# Altium PCB CNC_shield_mkr1000_PCB_Header_NormalHeader.PcbDoc
Units mm, origin at the board's own origin, x right, y up, seen from the top; angles counter-clockwise.
Board outline 120.25 x 80.25 mm, 2 copper layers (Top Layer, Bottom Layer); 13 components, 32 nets, 111 pads, 0 vias.
Unrouted connection lines stored in the file: 2.
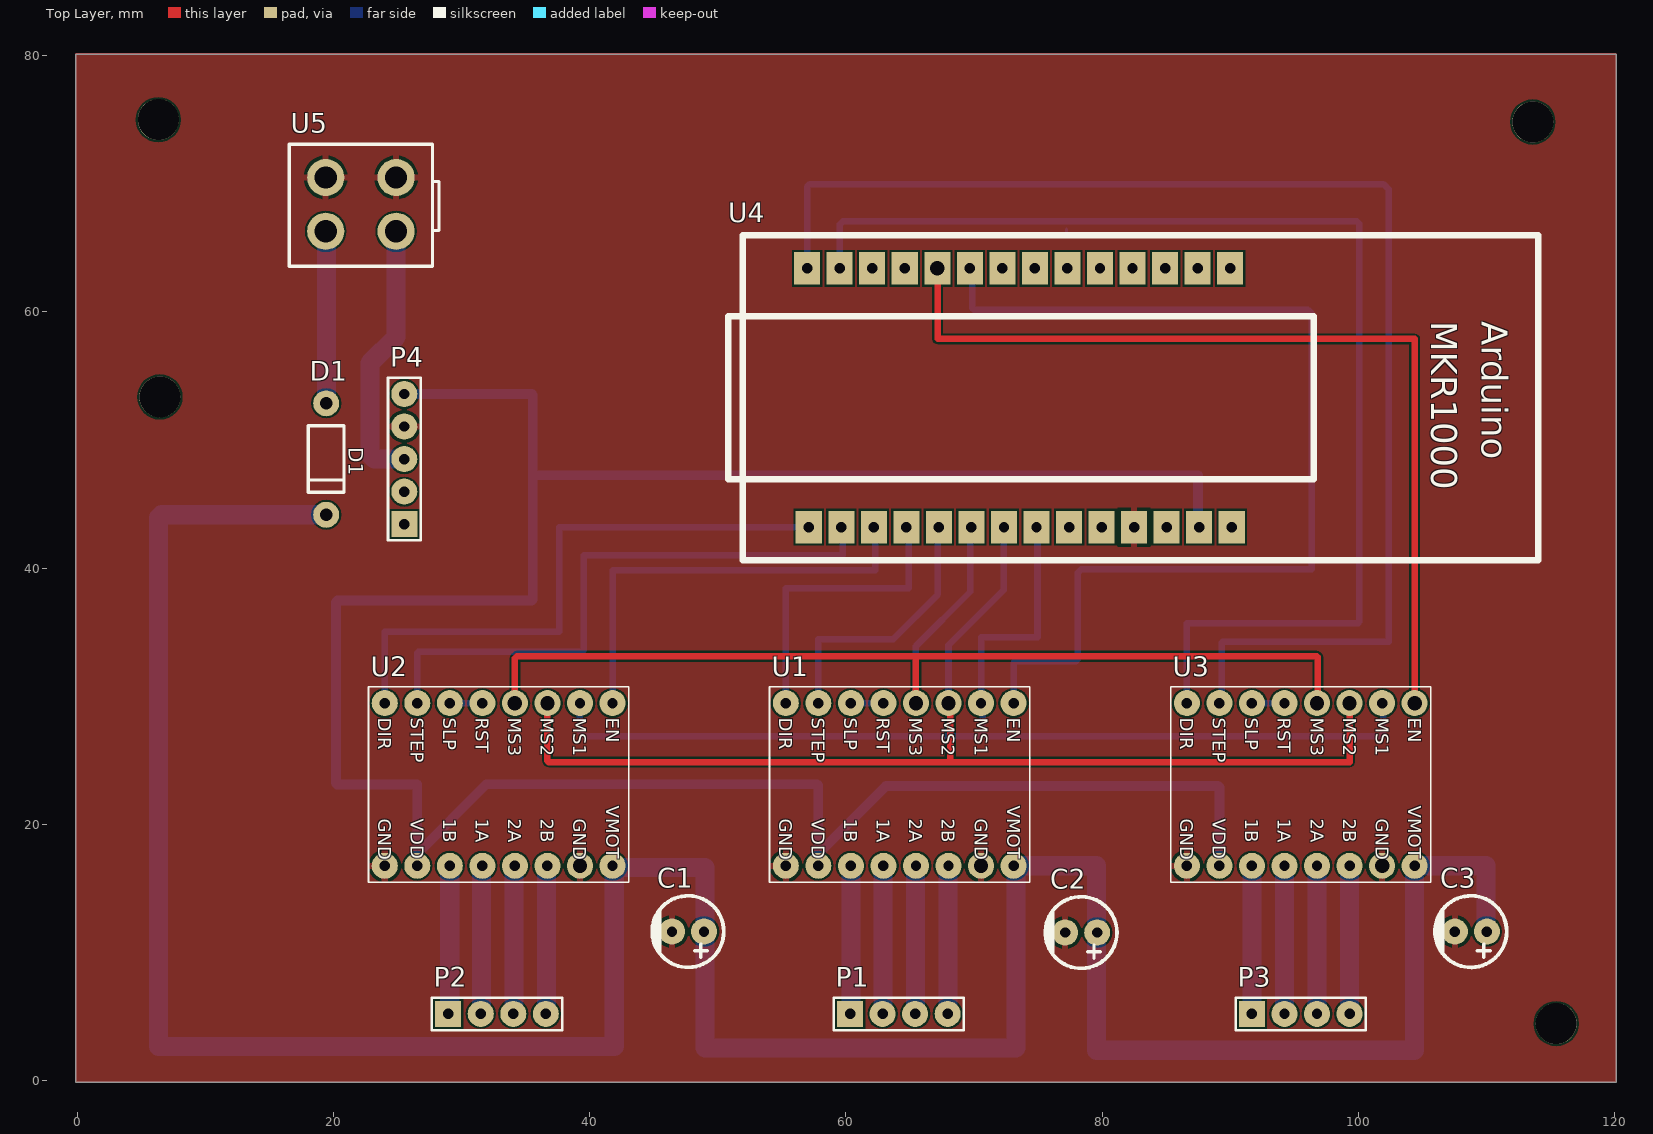
[diagram p0: Top Layer view]
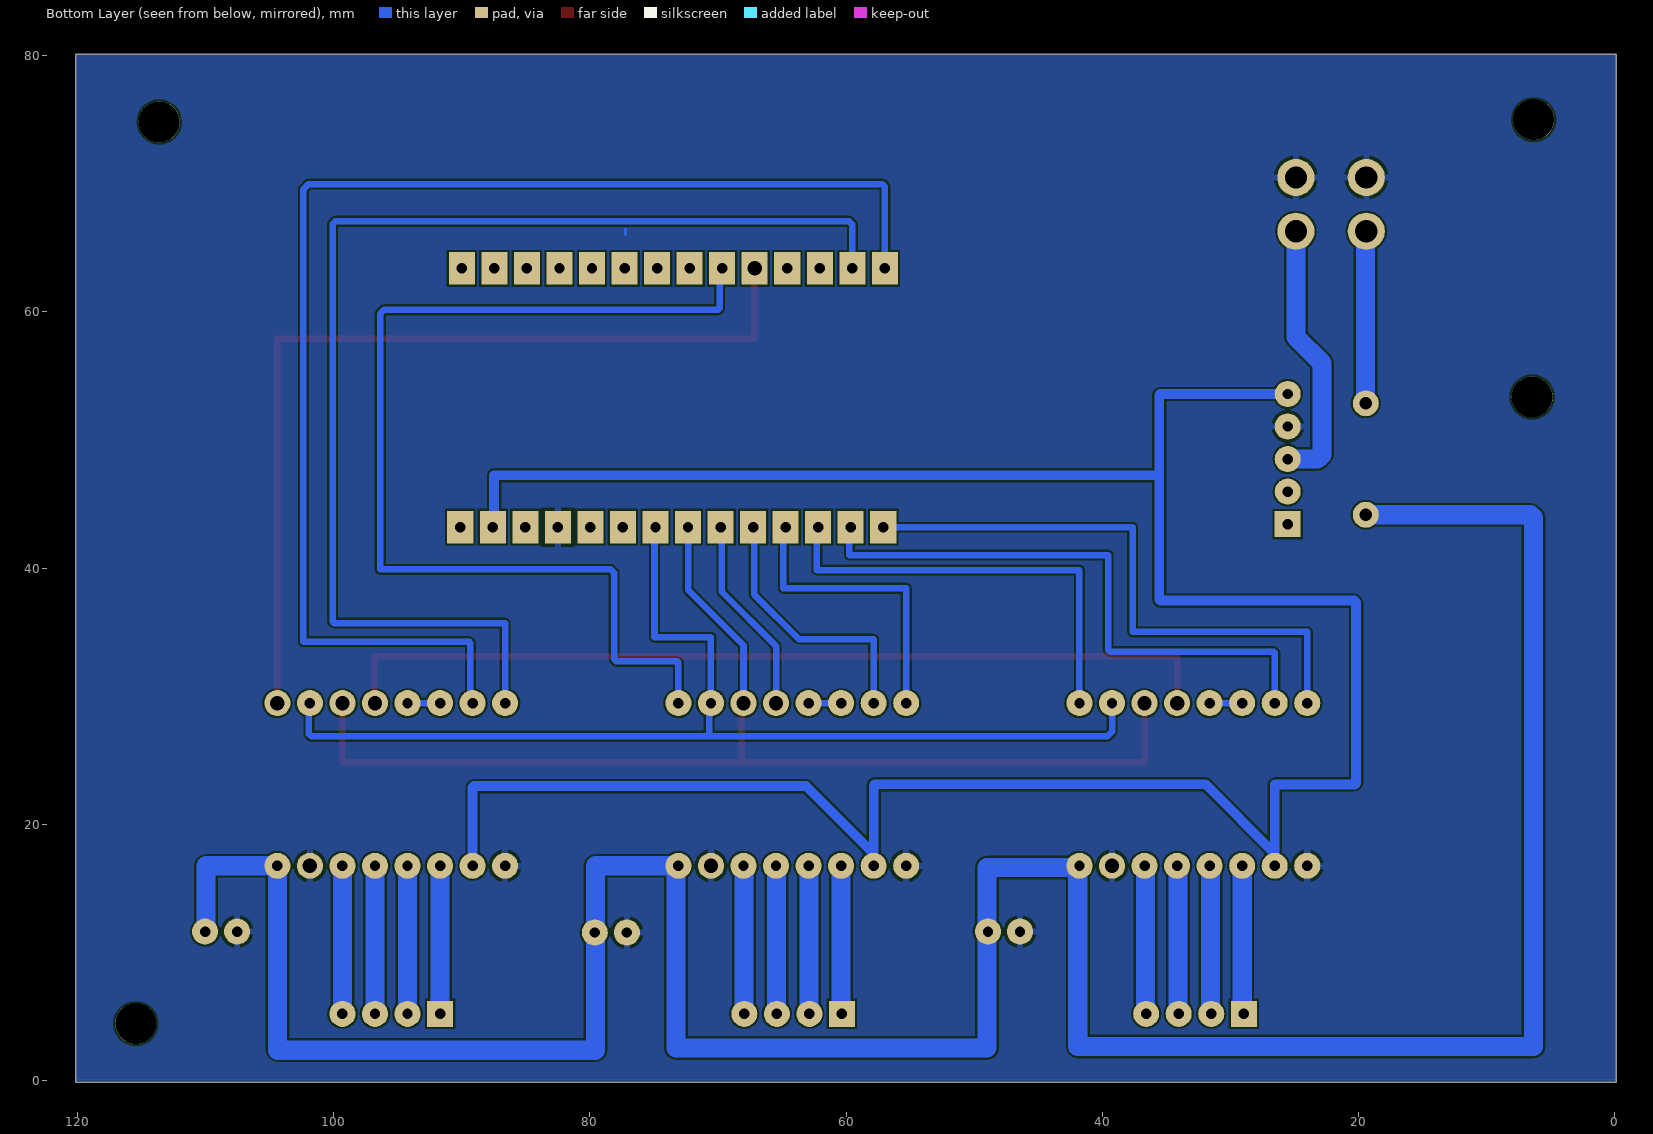
[diagram p1: Bottom Layer view, seen from below]

## Layer stack, top to bottom
Top Solder: solder mask 0.0102, Solder Resist, Dk 3.5
Top Layer: signal copper 0.0356
Dielectric 1: dielectric 0.32, FR-4, Dk 4.8
Bottom Layer: signal copper 0.0356
Bottom Solder: solder mask 0.0102, Solder Resist, Dk 3.5

## Board outline
-0.127,-0.127 -0.127,80.127 120.127,80.127 120.127,-0.127

## Design rules (kind name [scope] priority, off if disabled: settings)
Clearance [All] p1: gap=0.152 ignorepadtopadclearanceinfootprint=FALSE
PlaneClearance [All] p1: clearance=0.203
PolygonConnect [All] p1: connectstyle=Relief reliefconductorwidth=0.508 reliefentries=4 polygonreliefangle="90 Angle" airgapwidth=0.254
RoomDefinition CNC_shield_for_mkr1000_Sch [InComponentClass('CNC_shield_for_mkr1000_Sch')] p1: confinementstyle=ConfineIn formatcopy=TRUE lockcomponents=FALSE outline -38.989,-44.323 11.811,-44.323 11.811,-18.923 -38.989,-18.923
RoutingVias [All] p1: holewidth=0.305 width=0.559 viastyle="Through Hole" minholewidth=0.305 minwidth=0.559 maxholewidth=0.305 maxwidth=0.559
SolderMaskExpansion [All] p1: expansion=0.102
Width Power [InNetClass('Power')] p1: maxlimit=1.27 minlimit=0.381 preferedwidth=0.762 minimp=50.000000 maximp=50.000000 favimp=50.000000
Width [All] p2: maxlimit=1.27 minlimit=0.152 preferedwidth=0.508 minimp=50.000000 maximp=50.000000 favimp=50.000000
29 further rules are at their usual default settings.

## Components (designator, comment, footprint, x,y, rotation, side; value= is the part's Value field where it differs from the comment)
C1 "C43803" C43803 47.676,11.633 r180 top value=100uF
C2 "C43803" C43803 78.364,11.557 r180 top value=100uF
C3 "C43803" C43803 108.785,11.631 r180 top value=100uF
D1 "MUR120" MUR120 19.431,48.514 r270 top
P1 "Header 1 x 4" HDR1X4 60.325,5.207 r0 top
P2 "Header 1 x 4" HDR1X4 28.956,5.207 r0 top
P3 "Header 1 x 4" HDR1X4 91.694,5.207 r0 top
P4 "Header 5" HDR1X5 25.527,43.434 r90 top
U1 "A4988" "A4988 DRIVER"#1 64.198,23.114 r270 top
U2 "A4988" "A4988 DRIVER"#1 32.893,23.114 r270 top
U3 "A4988" "A4988 DRIVER"#2 95.504,23.114 r270 top
U4 "MKR 1000" MKR1000 73.546,53.302 r270 top
U5 "ATX 4" ATX4 22.142,68.394 r0 top

## Footprints (in the part's own frame and the unit in brackets; to place one, negate y for a bottom-side part, rotate by r counter-clockwise, add the part's x,y. Pads: shape width x height; smd on the part's side, far side on the other; paste and mask are expansions set on the pad)
"A4988 DRIVER"#1 [mil]
  round 80 hole 32: 1(-250,350) 2(-250,250) 5(-250,-50) 6(-250,-150) 7(-250,-250) 8(-250,-350) 9(250,-350) 10(250,-250) 11(250,-150) 12(250,-50) 13(250,50) 14(250,150) 16(250,350)
  round 80 hole 44: 3(-250,150) 4(-250,50) 15(250,250)
  silkscreen extent -300,-400 300,400
"A4988 DRIVER"#2 [mil]
  round 80 hole 44: 1(-250,350) 3(-250,150) 4(-250,50) 15(250,250)
  round 80 hole 32: 2(-250,250) 5(-250,-50) 6(-250,-150) 7(-250,-250) 8(-250,-350) 9(250,-350) 10(250,-250) 11(250,-150) 12(250,-50) 13(250,50) 14(250,150) 16(250,350)
  silkscreen extent -300,-400 300,400
ATX4 [mil]
  round 114.21 hole 68: 1(-108.25,-82.7) 2(-108.25,82.7) 3(108.25,-82.7) 4(108.25,82.7)
  silkscreen extent -220,-190 240,185
C43803 [mil] "Polarized Capacitor with 16V 5*7"
  round 80 hole 32: 1(-49.21,0) 2(49.21,0)
  silkscreen extent -110,-110 110,110
HDR1X4 [mil] "Connector; Header; 4 Position"
  rect 80x80 hole 32: 1(0,0)
  round 80 hole 32: 2(100,0) 3(200,0) 4(300,0)
  silkscreen extent -50,-50 350,50
HDR1X5 [mil] "Connector; Header; 5 Position"
  rect 80x80 hole 32: 1(0,0)
  round 80 hole 32: 2(100,0) 3(200,0) 4(300,0) 5(400,0)
  silkscreen extent -50,-50 450,50
MKR1000 [mil]
  rect 100x80 hole 32: 1(-397.5,647.5) 1(-397.5,647.5) 2(-397.5,547.5) 2(-397.5,547.5) 3(-397.5,447.5) 4(-397.5,347.5) 5(-397.5,247.5) 6(-397.5,147.5) 7(-397.5,47.5) 8(-397.5,-52.5) 9(-397.5,-152.5) 11(-397.5,-352.5) 12(-397.5,-452.5) 13(-397.5,-552.5) 14(-397.5,-652.5) 15(397.5,-647.5) 16(397.5,-547.5) 17(397.5,-447.5) 18(397.5,-347.5) 19(397.5,-247.5) 20(397.5,-147.5) 21(397.5,-47.5) 22(397.5,52.5) 23(397.5,152.5) 24(397.5,252.5) 25(397.5,352.5) 26(397.5,452.5) 27(397.5,552.5) 28(397.5,652.5)
  rect 100x80 hole 44: 10(-397.5,-252.5)
  silkscreen extent -500,-895 500,1595
MUR120 [mm] "MUR120_diode"
  round 2.032 hole 1: 1(-4.35,0) 2(4.35,0)
  silkscreen extent -2.6,-1.4 2.6,1.4

## Part data
C1 C2 C3: "Polarized Capacitor", LatestRevisionDate=29-May-2009, LatestRevisionNote="IPC-7351 Footprint Added.", PackageDescription="Chip Capacitor", PackageReference=C0805, Published=8-Jun-2000, Publisher="Altium Limited"
D1: "Diode", Code_JEDEC=DO-214-AB, LatestRevisionDate=17-Jul-2002, LatestRevisionNote="Re-released for DXP Platform.", PackageDescription="DO-214-AB/SMC; 2 C-Bend Leads; Body 7.9 x 5.9 mm, inc. leads (LxW)", PackageReference=SMC, PackageVersion=Sep-1996, Published=8-Jun-2000, Publisher="Altium Limited"
P1 P2 P3: "Header, 4-Pin", LatestRevisionDate=17-Jul-2002, LatestRevisionNote="Re-released for DXP Platform.", Publisher="Altium Limited"
P4: library part Header1x5, "Header, 5-Pin", LatestRevisionDate=17-Jul-2002, LatestRevisionNote="Re-released for DXP Platform.", Publisher="Altium Limited"
U1 U2 U3: "Motor Driver"
U4: library part "Arduino MKR 1000", "Arduino wifi"
U5: "ATX 4Pins power connector"

## Free pads (board coordinates)
  round 3.2 hole 3.2 unplated: 1(6.452,53.365) 2(6.325,75.006) 3(115.443,4.445) 4(113.614,74.828)

## Nets (pads, with @x,y where several pads share a name; then routed paths per layer and width w, separated by ;. In a path a pad name is that pad's centre, name@x,y a point inside that pad or via, vN(x,y) a via of type N, cw(c..) or ccw(c..) an arc to the next point about the centre after c; other vN are vias at no path point)
GND: C1.2 C2.2 C3.2 P4.4 U1.9 U1.15 U2.9 U2.15 U3.9 U3.15 U4.25 U5.2 U5.4 | length 1.2
  Bottom Layer w0.254: U5.4@24.809,70.578 U5.4 ; U2.15@39.094,16.913 U2.15 ; U1.15 U1.15@70.739,16.954 ; 77.216,66.04 77.216,66.472
  Bottom Layer w0.762: U3.9@86.614,16.637 U3.9
NetC1_1: C1.1 C2.1 C3.1 D1.2 U1.16 U2.16 U3.16 | length 234.6
  Bottom Layer w1.5: D1.2@19.177,44.164 6.572,44.164 6.35,43.942 6.35,2.667 41.91,2.667 U2.16@41.91,16.637 ; U2.16 U2.16@41.91,16.637 ; C3.1@110.109,11.557 109.96,11.706 109.96,16.764 U3.16 104.394,2.413 104.356,2.375 79.557,2.375 79.557,11.557 79.557,16.764 73.533,16.764 73.279,16.764 U1.16 73.279,16.573 73.279,2.54 49.006,2.54 49.006,11.557 49.006,16.637 U2.16@41.91,16.637
NetD1_1: D1.1 U5.1 | length 12.9
  Bottom Layer w1.5: D1.1@19.453,53.14 U5.1@19.453,66.076
NetP1_1: P1.1 U1.11 | length 11.5
  Bottom Layer w1.5: P1.1@60.389,5.271 U1.11
NetP1_2: P1.2 U1.12 | length 11.5
  Bottom Layer w1.5: P1.2@62.897,5.239 U1.12@62.897,16.732
NetP1_3: P1.3 U1.13 | length 11.5
  Bottom Layer w1.5: P1.3@65.437,5.239 U1.13@65.437,16.732
NetP1_4: P1.4 U1.14 | length 11.5
  Bottom Layer w1.5: P1.4@67.977,5.239 U1.14@67.977,16.732
NetP2_1: P2.1 U2.11 | length 11.4
  Bottom Layer w1.5: P2.1@29.083,5.334 U2.11
NetP2_2: P2.2 U2.12 | length 11.4
  Bottom Layer w1.5: P2.2@31.559,5.271 U2.12@31.559,16.7
NetP2_3: P2.3 U2.13 | length 11.4
  Bottom Layer w1.5: P2.3@34.099,5.271 U2.13@34.099,16.7
NetP2_4: P2.4 U2.14 | length 11.4
  Bottom Layer w1.5: P2.4@36.639,5.271 U2.14@36.639,16.7
NetP3_1: P3.1 U3.11 | length 11.6
  Bottom Layer w1.5: P3.1 U3.11
NetP3_2: P3.2 U3.12 | length 11.6
  Bottom Layer w1.5: P3.2 U3.12
NetP3_3: P3.3 U3.13 | length 11.6
  Bottom Layer w1.5: P3.3 U3.13
NetP3_4: P3.4 U3.14 | length 11.6
  Bottom Layer w1.5: P3.4 U3.14
NetP4_3: P4.3 U5.3 | length 21.1
  Bottom Layer w1.5: U5.3 24.892,58.036 22.86,56.004 22.86,48.857 23.203,48.514 P4.3
NetP4_5: P4.5 U1.10 U2.10 U3.10 U4.27 | length 203.1
  Bottom Layer w0.762: 20.193,23.203 20.193,37.338 ; 20.282,23.114 26.543,23.114 ; 20.32,37.465 35.471,37.465 ; P4.5 35.496,53.594 35.56,53.53 35.56,47.244 ; U2.10 U2.10@26.543,17.729 ; 26.543,23.038 U2.10@26.543,17.729 ; 35.56,37.554 35.56,47.244 ; 57.759,23.14 31.954,23.14 U2.10@26.543,17.729 ; U1.10 U1.10@57.848,17.716 ; 57.848,23.05 U1.10@57.848,17.716 ; U4.27 87.478,43.307 87.478,47.244 35.56,47.244 ; 89.065,22.987 63.119,22.987 U1.10@57.848,17.716 ; U3.10 89.154,22.898
NetU1_1: U1.1 U4.9 | length 83.5
  Top Layer w0.508: U4.9 U4.9@69.875,63.195
  Bottom Layer w0.508: U4.9 69.875,63.195 69.875,60.274 69.977,60.173 96.063,60.173 96.368,59.868 96.368,39.929 ; U1.1 73.088,32.626 73.178,32.715 77.927,32.715 78.105,32.893 78.105,39.624 78.384,39.903 96.368,39.903
NetU1_2: U1.2 U2.2 U3.2 U4.22 | length 88.8
  Bottom Layer w0.508: U2.2 39.243,27.229 39.599,26.873 70.599,26.873 ; 72.339,43.205 72.593,42.951 ; U4.22 74.955,43.129 74.955,34.595 70.549,34.595 U1.2 70.688,29.324 70.688,26.962 70.599,26.873 ; U3.2 101.93,29.388 101.93,27.051 101.752,26.873 70.599,26.873
NetU1_3: U1.3 U2.3 U3.3 U4.21 | length 92.2
  Top Layer w0.508: U2.3 36.703,24.956 36.792,24.867 68.059,24.867 ; U1.3 68.148,29.324 68.148,24.956 68.059,24.867 ; U3.3 99.314,24.867 68.059,24.867
  Bottom Layer w0.508: U1.3 68.008,33.972 72.339,38.303 72.339,42.291 72.32,42.291 U4.21@71.872,42.738 ; 69.799,43.205 69.901,43.104 ; U4.21@72.124,42.99 U4.21@72.365,42.749
NetU1_4: U1.4 U2.4 U3.4 U4.20 | length 88.8
  Top Layer w0.508: U2.4 34.163,32.969 34.315,33.122 65.379,33.122 ; U1.4 65.468,33.032 65.379,33.122 ; U3.4 96.85,29.54 96.85,33.032 96.761,33.122 65.379,33.122
  Bottom Layer w0.508: U1.4 65.468,33.922 69.698,38.151 69.698,42.443 69.627,42.443 U4.20@69.332,42.738
NetU1_5: U1.5 U1.6 | length 2.5
  Bottom Layer w0.508: U1.6 U1.5
NetU1_7: U1.7 U4.19 | length 21.1
  Bottom Layer w0.508: U1.7 57.848,34.468 63.703,34.468 67.183,37.948 67.183,43.129 U4.19
NetU1_8: U1.8 U4.18 | length 23.4
  Bottom Layer w0.508: U1.8 55.308,38.43 64.897,38.43 64.897,43.028 U4.18 U4.18@64.694,43.18
NetU2_1: U2.1 U4.17 | length 34.3
  Bottom Layer w0.508: U2.1 41.783,39.853 62.281,39.853 62.281,43.104 U4.17
NetU2_5: U2.5 U2.6 | length 2.5
  Bottom Layer w0.508: U2.6 U2.5
NetU2_7: U2.7 U4.16 | length 46.8
  Bottom Layer w0.508: U2.7 26.543,33.388 26.632,33.477 39.395,33.477 39.548,33.63 39.548,41.021 59.741,41.021 59.741,43.104 U4.16
NetU2_8: U2.8 U4.15 | length 46.8
  Bottom Layer w0.508: U2.8 24.003,35.027 37.643,35.027 37.643,43.18 U4.15
NetU3_1: U3.1 U4.10 | length 71.2
  Top Layer w0.508: U4.10 67.158,63.373 67.158,57.887 104.394,57.887 U3.1
NetU3_5: U3.5 U3.6 | length 2.5
  Bottom Layer w0.508: U3.6 U3.5
NetU3_7: U3.7 U4.14 | length 105.2
  Bottom Layer w0.508: U4.14 56.972,69.774 57.175,69.977 101.956,69.977 102.362,69.571 102.362,34.265 89.421,34.265 89.332,34.175 89.332,29.642 U3.7
NetU3_8: U3.8 U4.13 | length 95
  Bottom Layer w0.508: U4.13 59.512,66.827 59.766,67.081 99.873,67.081 100.076,66.878 100.076,35.802 99.987,35.712 86.614,35.712 U3.8
pads on no net: P4.1 P4.2 U4.1 U4.2 U4.3 U4.4 U4.5 U4.6 U4.7 U4.8 U4.11 U4.12 U4.23 U4.24 U4.26 U4.28

## Polygon pours and split planes (outlines as drawn)
GND on Bottom Layer "GND_L02_P103" (solid, remove dead copper, pour order 103): -0.076,80.112 -0.076,0.025 120.066,0.025 120.066,80.086 120.091,80.112
GND on Bottom Layer "NONET_L02_P097" (solid, remove dead copper, shelved, pour order 97): -0.076,80.112 -0.076,0.025 120.066,0.025 120.117,0.076 120.091,0.102 120.091,80.112
GND on Bottom Layer "NONET_L02_P093" (solid, remove dead copper, shelved, pour order 93): -0.076,80.112 -0.076,0.025 120.117,0.025 120.142,0.051 120.091,0.102 120.091,80.112
GND on Bottom Layer "NONET_L02_P089" (solid, remove dead copper, shelved, pour order 89): -0.076,80.112 -0.076,0.025 120.117,0.025 120.142,0.051 120.091,0.102 120.091,80.112
GND on Top Layer "GND_L01_P101" (solid, remove dead copper, pour order 101): -0.102,80.137 -0.102,-0.102 120.142,-0.102 120.117,-0.076 120.117,80.162
GND on Top Layer "NONET_L01_P099" (solid, remove dead copper, shelved, pour order 99): -0.102,80.137 -0.102,-0.102 120.142,-0.102 120.142,80.137 120.117,80.162
GND on Top Layer "NONET_L01_P095" (solid, remove dead copper, shelved, pour order 95): -0.102,80.137 -0.102,-0.102 120.142,-0.102 120.142,80.137
GND on Top Layer "NONET_L01_P091" (solid, remove dead copper, shelved, pour order 91): -0.102,80.137 -0.102,-0.102 120.142,-0.102 120.142,80.137 120.117,80.162

## Silkscreen, mask and mechanical layers (free items; w line width, h text height)
Mechanical 1:
  lines w0.254: -0.229,-0.305 -0.178,-0.254 -0.178,80.264 120.167,80.264 120.269,80.162 120.269,-0.305 -0.229,-0.305

## Text inside footprints (layer, text, board x,y; h text height)
U1: Top Overlay "SLP" at 59.88,28.321 h1.02 r270; Top Overlay "RST" at 62.42,28.321 h1.02 r270; Top Overlay "EN" at 72.581,28.321 h1.02 r270; Top Overlay "VMOT" at 72.581,21.463 h1.02 r270; Top Overlay "GND" at 70.04,20.447 h1.02 r270; Top Overlay "2B" at 67.501,20.447 h1.02 r270; Top Overlay "2A" at 64.96,20.447 h1.02 r270; Top Overlay "1A" at 62.42,20.447 h1.02 r270; Top Overlay "1B" at 59.88,20.447 h1.02 r270; Top Overlay "VDD" at 57.34,20.447 h1.02 r270; Top Overlay "GND" at 54.8,20.447 h1.02 r270; Top Overlay "DIR" at 54.8,28.321 h1.02 r270; Top Overlay "STEP" at 57.34,28.321 h1.02 r270; Top Overlay "MS3" at 64.96,28.321 h1.02 r270; Top Overlay "MS2" at 67.501,28.321 h1.02 r270; Top Overlay "MS1" at 70.04,28.321 h1.02 r270
U2: Top Overlay "SLP" at 28.575,28.321 h1.02 r270; Top Overlay "RST" at 31.115,28.321 h1.02 r270; Top Overlay "EN" at 41.275,28.321 h1.02 r270; Top Overlay "VMOT" at 41.275,21.463 h1.02 r270; Top Overlay "GND" at 38.735,20.447 h1.02 r270; Top Overlay "2B" at 36.195,20.447 h1.02 r270; Top Overlay "2A" at 33.655,20.447 h1.02 r270; Top Overlay "1A" at 31.115,20.447 h1.02 r270; Top Overlay "1B" at 28.575,20.447 h1.02 r270; Top Overlay "VDD" at 26.035,20.447 h1.02 r270; Top Overlay "GND" at 23.495,20.447 h1.02 r270; Top Overlay "DIR" at 23.495,28.321 h1.02 r270; Top Overlay "STEP" at 26.035,28.321 h1.02 r270; Top Overlay "MS3" at 33.655,28.321 h1.02 r270; Top Overlay "MS2" at 36.195,28.321 h1.02 r270; Top Overlay "MS1" at 38.735,28.321 h1.02 r270
U3: Top Overlay "SLP" at 91.186,28.321 h1.02 r270; Top Overlay "RST" at 93.726,28.321 h1.02 r270; Top Overlay "EN" at 103.886,28.321 h1.02 r270; Top Overlay "VMOT" at 103.886,21.463 h1.02 r270; Top Overlay "GND" at 101.346,20.447 h1.02 r270; Top Overlay "2B" at 98.806,20.447 h1.02 r270; Top Overlay "2A" at 96.266,20.447 h1.02 r270; Top Overlay "1A" at 93.726,20.447 h1.02 r270; Top Overlay "1B" at 91.186,20.447 h1.02 r270; Top Overlay "VDD" at 88.646,20.447 h1.02 r270; Top Overlay "GND" at 86.106,20.447 h1.02 r270; Top Overlay "DIR" at 86.106,28.321 h1.02 r270; Top Overlay "STEP" at 88.646,28.321 h1.02 r270; Top Overlay "MS3" at 96.266,28.321 h1.02 r270; Top Overlay "MS2" at 98.806,28.321 h1.02 r270; Top Overlay "MS1" at 101.346,28.321 h1.02 r270
U4: Top Overlay "Arduino" at 109.614,59.271 h2.03 r270; Top Overlay "MKR1000" at 105.677,59.271 h2.03 r270